# Allegro board ONYXPSU.brd
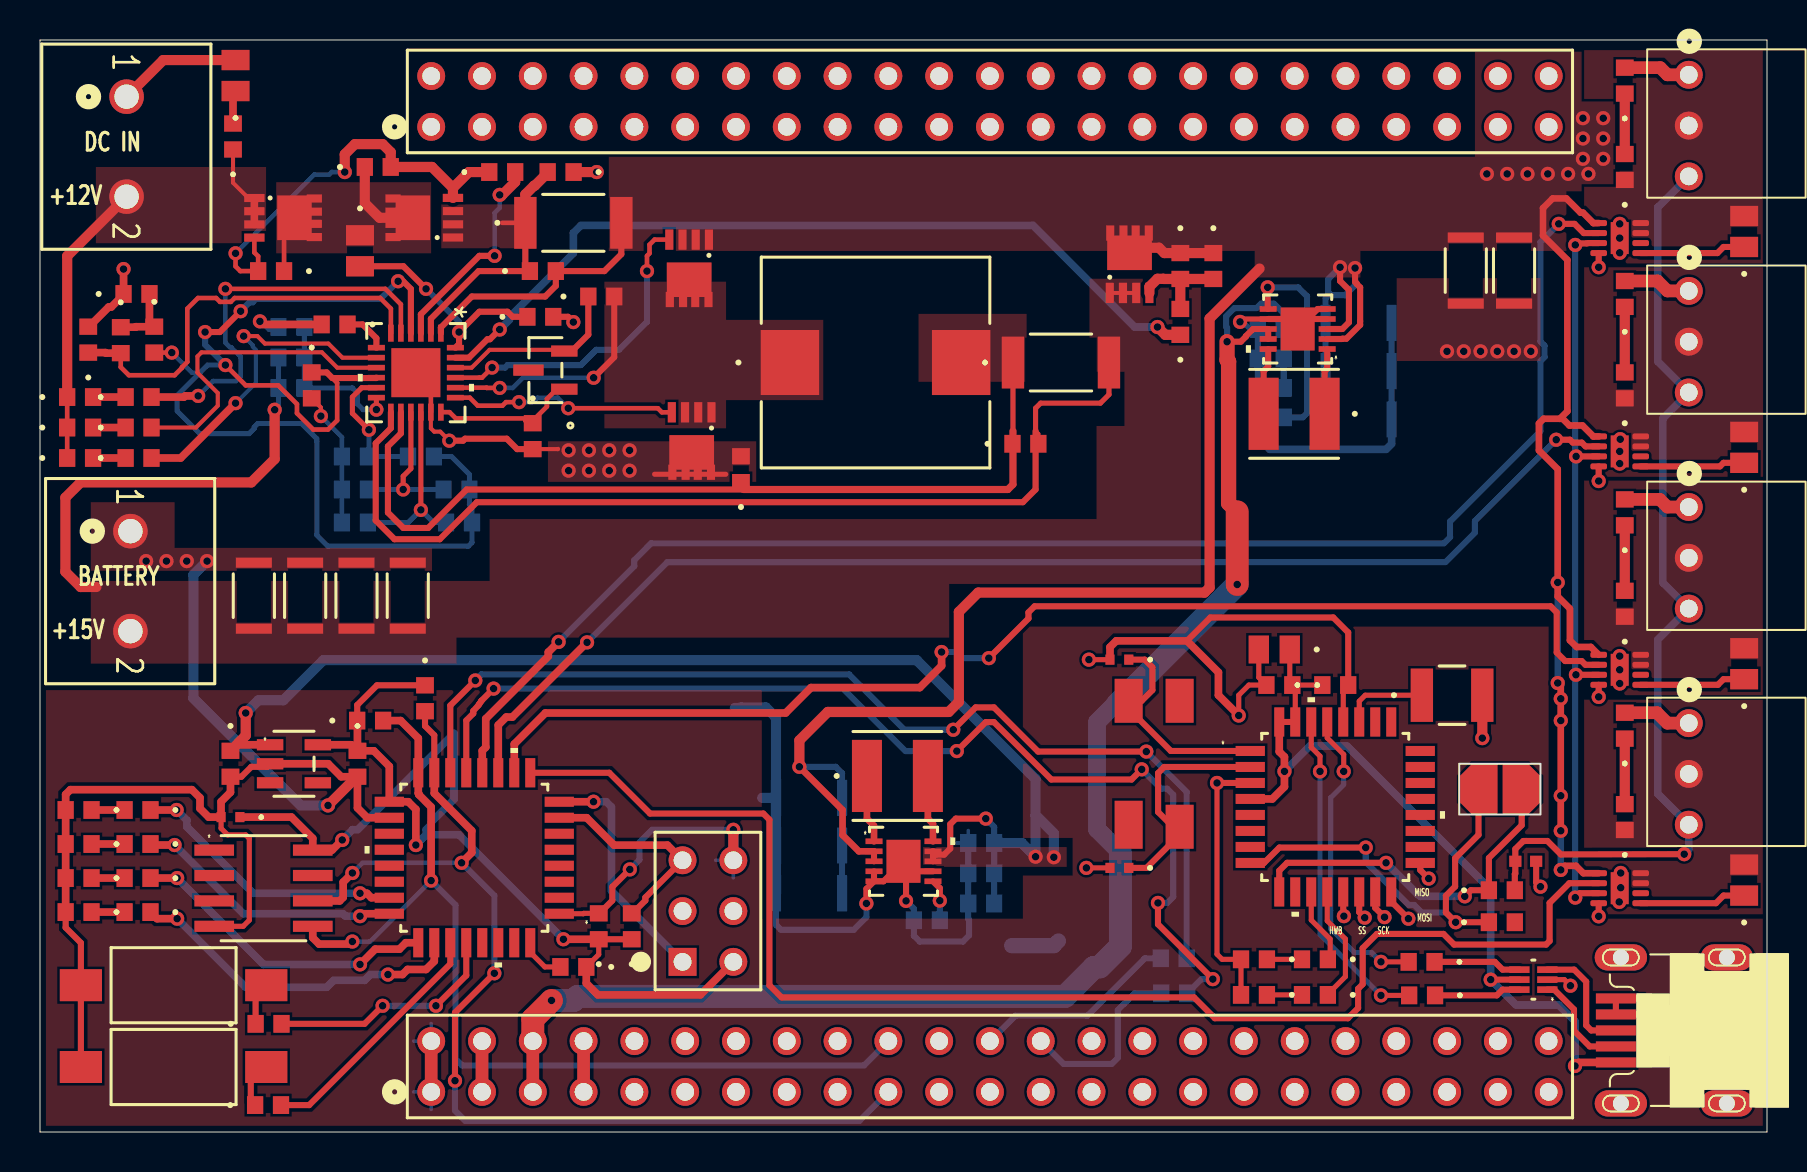
[diagram p0: board, top side]
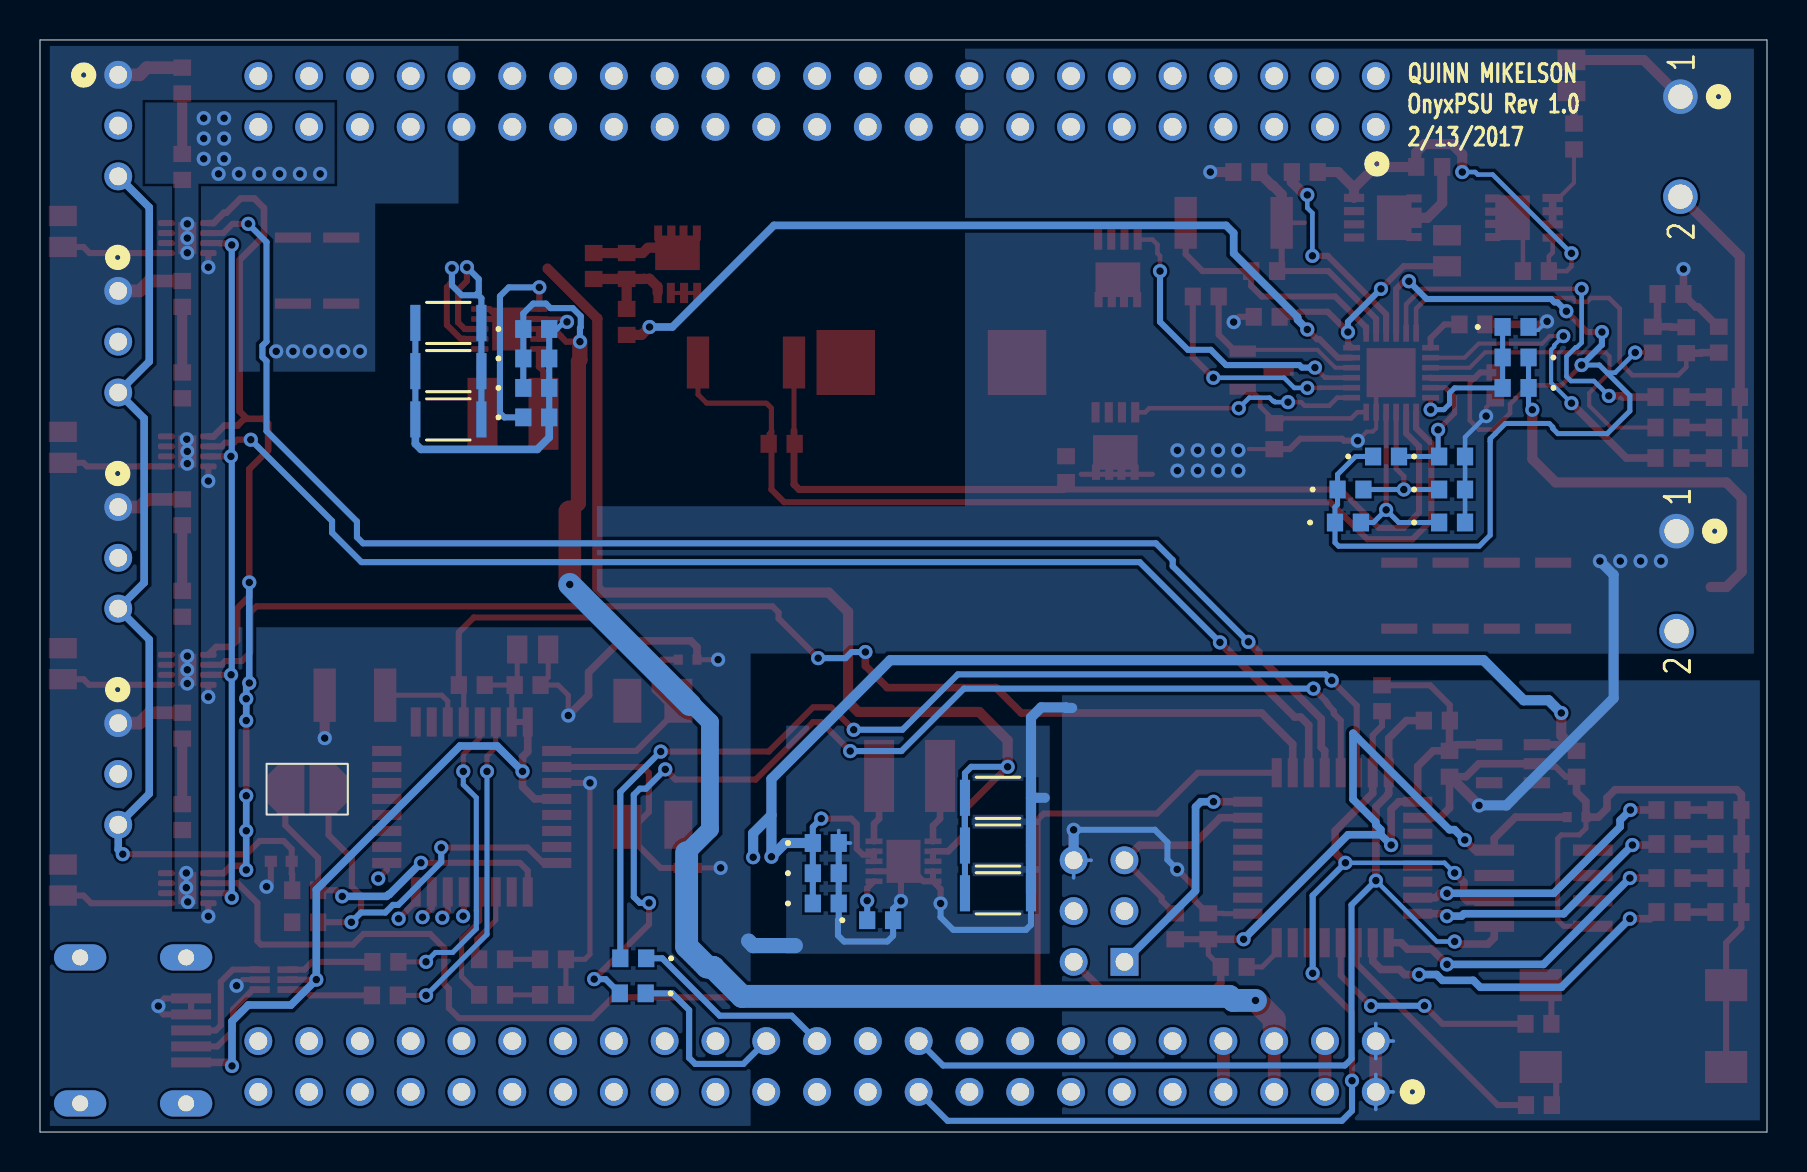
[diagram p1: board, bottom side, seen from below]

Outline 86.36 x 54.61 mm; copper layers: TOP, BOTTOM. Coordinates in mm from the lower left corner of the outline.
Outline path: 0,54.61 0,0 86.36,0 86.36,54.61 0,54.61

## Placement (name value [footprint] x y rotation side)
A0  DXL-AX-SOCKET-3  [DXL_CONNECTOR]  82.45 52.87 270 top
A0_LED  LED_0603  [DK_0603]  79.25 48.26 90 top
A0_RBLEED  698  [DK_0805]  85.22 45.03 90 top
A0_SW  -  [NCP45521IMNTWG-H]  78.93 44.7 270 top
A1  DXL-AX-SOCKET-3  [DXL_CONNECTOR]  82.45 42.06 270 top
A1_LED  LED_0603  [DK_0603]  79.25 37.34 90 top
A1_RBLEED  698  [DK_0805]  85.22 34.24 90 top
A1_SW  -  [NCP45521IMNTWG-H]  78.93 34.04 270 top
A2  DXL-AX-SOCKET-3  [DXL_CONNECTOR]  82.45 31.25 270 top
A2_LED  LED_0603  [DK_0603]  79.25 26.42 90 top
A2_RBLEED  698  [DK_0805]  85.22 23.42 90 top
A2_SW  -  [NCP45521IMNTWG-H]  78.93 23.11 270 top
A3  DXL-AX-SOCKET-3  [DXL_CONNECTOR]  82.45 20.45 270 top
A3_LED  LED_0603  [DK_0603]  79.25 15.75 90 top
A3_RBLEED  698  [DK_0805]  85.22 12.6 90 top
A3_SW  -  [NCP45521IMNTWG-H]  78.93 12.19 270 top
A_R1  470  [DK_0603]  79.25 52.58 90 top
A_R2  470  [DK_0603]  79.25 41.91 90 top
A_R3  470  [DK_0603]  79.25 30.99 90 top
A_R4  470  [DK_0603]  79.25 20.32 90 top
AC_C1  2.2uF  [DK_0805]  9.78 52.83 90 top
AC_R1  2  [DK_0603]  9.65 49.78 90 top
AC_SENSE  .01  [DK_2010]  26.67 45.47 0 top
ACDRV_R1  1K  [DK_0603]  23.11 48.01 0 top
ACSET_R1  100K  [DK_0603]  20.95 30.48 180 bottom
ACSET_R2  154K  [DK_0603]  15.75 30.48 180 bottom
ADAPTER  -  [CONN_282836-2]  4.33 51.78 270 top
AT_C1  4.7uF  [DK_0805]  61.72 24.13 180 top
AT_C2  .1uF  [DK_0603]  64.77 22.35 0 top
AT_C3  .1uF  [DK_0603]  61.98 22.35 180 top
AT_LED1  LED_0603  [DK_0603]  60.71 6.86 180 top
AT_LED2  LED_0603  [DK_0603]  60.71 8.64 180 top
AT_R1  150  [DK_0603]  63.75 6.86 180 top
AT_R2  150  [DK_0603]  63.75 8.64 180 top
AT_UCAP  10uF  [DK_1210]  70.61 21.84 0 top
ATMEGA  ATMEGA32U2-AU  [32A]  64.77 16.26 0 top
AX_ESD  CPDQC5V0-HF  [CPDQC]  74.3 13.54 180 top
AX_R1  150  [DK_0603]  73.1 12.09 0 top
AX_R2  150  [DK_0603]  73.1 10.49 0 top
BATDRV_Q  SI7617DN  [POWERPAK1212-8]  54.48 43.43 90 top
BATDRV_R1  1K  [DK_0603]  57.02 40.51 90 top
BATT_SENSE  .01  [DK_2010]  51.05 38.48 0 top
BATTERY  -  [CONN_282836-2]  4.52 30.05 270 top
BATTERY_CHARGER  BQ24610  [RGE24_2P45X2P45]  18.8 37.97 270 top
BB_P1  Priceless  [2-87215-3]  19.56 2.01 0 top
BB_P2  Priceless  [2-87215-3]  19.56 50.27 0 top
BC_C1  1uF  [DK_0603]  24.64 34.8 270 top
BC_C2  .1uF  [DK_0603]  35.05 33.15 90 top
BC_C3  .1uF  [DK_0603]  49.28 34.42 0 top
BC_C4  .1uF  [DK_0603]  58.67 43.31 270 top
BC_C5  1uF  [DK_0603]  25.02 40.77 0 top
BC_C6  .1uF  [DK_0603]  28.07 41.78 0 top
BC_C7  1uF  [DK_0603]  11.56 43.05 180 top
BC_C8  .1uF  [DK_0603]  26.04 48.01 180 top
BC_C9  .1uF  [DK_0603]  25.15 43.05 0 top
BC_C10  .1uF  [DK_0603]  2.41 39.62 90 top
BC_R1  100K  [DK_0603]  57.02 43.31 270 top
BC_R2  100K  [DK_0603]  16.89 48.26 0 top
BC_VCC_R1  10  [DK_0805]  16 44.07 270 top
BCAP1  10uF  [DK_1206]  10.69 26.82 90 top
BCAP2  10uF  [DK_1206]  15.82 26.82 90 top
BCAP3  10uF  [DK_1206]  13.26 26.82 90 top
BCAP4  10uF  [DK_1206]  18.39 26.82 90 top
BTST_D1  BAT54  [DK_SOT23-3]  25.27 38.1 90 top
BTST_L1  3.3uH  [IND_IHLP-4040DZ]  41.78 38.48 0 top
DC_Q1  SI7617DN  [POWERPAK1212-8]  12.19 45.72 0 top
DC_Q2  SI7617DN  [POWERPAK1212-8]  19.18 45.72 180 top
E_CVCC  .1uF  [DK_0402]  9.53 15.75 180 top
EEPROM  CAT24C256WI-GT3  [D8]  11.18 12.19 0 top
HIDRV_Q  SIS412DN  [POWERPAK1212-8]  32.46 43.15 270 top
ISET1_R1  100K  [DK_0603]  19.05 33.78 180 bottom
ISET1_R2  154K  [DK_0603]  15.75 33.78 180 bottom
ISET2_R1  130K  [DK_0603]  20.83 32.13 180 bottom
ISET2_R2  10K  [DK_0603]  15.75 32.13 180 bottom
LOWDRV_Q  SIS412DN  [POWERPAK1212-8]  32.59 34.52 270 top
PG  LED_0603  [DK_0603]  4.93 33.71 0 top
PG_R  10K  [DK_0603]  2.01 33.71 0 top
PWRPTH_C1  10uF  [DK_1206]  71.3 43.08 270 top
PWRPTH_C2  10uF  [DK_1206]  73.71 43.08 270 top
SJ1  SJ  [SOLDERJUMPER]  -81.81 -31.75 0 top
STAT1  LED_0603  [DK_0603]  4.93 36.75 0 top
STAT1_R  10K  [DK_0603]  2.01 36.75 0 top
STAT2  LED_0603  [DK_0603]  4.93 35.23 0 top
STAT2_R  10K  [DK_0603]  2.01 35.23 0 top
TS_R1  200K  [DK_0603]  4.04 39.6 270 top
TS_R2  9.31K  [DK_0603]  5.71 39.62 270 top
TS_R3  430K  [DK_0603]  4.83 41.91 0 top
TTC_C1  .033uF  [DK_0603]  14.73 40.39 180 top
TVS1  USBLC6-2P6  [SOT-666]  74.68 7.62 180 top
UART_R1  1K  [DK_0603]  56.72 6.93 0 bottom
UART_R2  1K  [DK_0603]  56.69 8.69 0 bottom
UNK5V_C1  10uF  [DK_1206]  38.46 11.94 180 bottom
UNK5V_C2  10uF  [DK_1206]  38.46 14.33 180 bottom
UNK5V_C3  10uF  [DK_1206]  38.46 16.71 180 bottom
UNK5V_C4  22uF  [DK_0603]  47.07 11.43 180 bottom
UNK5V_C5  22uF  [DK_0603]  47.07 12.94 180 bottom
UNK5V_C6  22uF  [DK_0603]  47.07 14.45 180 bottom
UNK5V_C7  .1uF  [DK_0603]  44.35 10.59 180 bottom
UNK5V_C8  10uF  [DK_1206]  65.94 40.46 0 bottom
UNK5V_C9  10uF  [DK_1206]  65.94 38.05 0 bottom
UNK5V_C10  10uF  [DK_1206]  65.94 35.64 0 bottom
UNK5V_C11  22uF  [DK_0603]  61.54 40.16 180 bottom
UNK5V_C12  22uF  [DK_0603]  61.54 38.68 180 bottom
UNK5V_C13  22uF  [DK_0603]  61.54 37.21 180 bottom
UNK5V_C14  .1uF  [DK_0603]  61.54 35.74 180 bottom
UNK5V_L1  1uH  [IND_BOURNS_SRN4018]  42.88 17.81 0 top
UNK5V_L2  1uH  [IND_BOURNS_SRN4018]  62.71 35.92 180 top
UNK5V_REG  TPS63061  [DSC10_1P70X2P15]  43.18 13.54 0 top
UNK5V_REG1  TPS63061  [DSC10_1P70X2P15]  62.89 40.16 180 top
USB1  -  [UX60-USB]  80.45 5.08 180 top
USB_RD+  22  [DK_0603]  69.09 8.51 180 top
USB_RD-  22  [DK_0603]  69.11 6.83 180 top
VFB_C1  22pF  [DK_0603]  12.57 37.21 0 bottom
VFB_R1  732K  [DK_0603]  12.57 38.73 0 bottom
VFB_R2  121K  [DK_0603]  12.57 40.26 180 bottom
VREF_C1  22uF  [DK_0603]  13.59 37.34 270 top
X3_C1  1uF  [DK_0603]  9.53 18.41 270 top
X3_C2  1uF  [DK_0603]  15.88 18.41 270 top
X3_C3  1uF  [DK_0603]  27.94 10.29 90 top
X3_LDO  MIC5504-3.3YM5-TR  [DK_SOT23-5]  12.7 18.41 0 top
X_L1  1.5K @ 100MHz  [DK_0603]  26.67 8.26 180 top
X_RSW1  39  [DK_0603]  11.4 1.35 0 top
X_RSW2  39  [DK_0603]  11.43 5.41 0 top
X_SW1  FSMSM  [SWITCH_FSMSM]  2.04 3.25 0 top
X_SW2  FSMSM  [SWITCH_FSMSM]  2.04 7.34 0 top
XL_LED1  LED_0603  [DK_0603]  1.93 16.1 180 top
XL_LED2  LED_0603  [DK_0603]  1.93 14.4 180 top
XL_LED3  LED_0603  [DK_0603]  1.93 12.7 180 top
XL_LED4  LED_0603  [DK_0603]  1.93 11 180 top
XL_R1  470R  [DK_0603]  4.88 16.1 180 top
XL_R2  470R  [DK_0603]  4.88 14.4 180 top
XL_R3  470R  [DK_0603]  4.88 12.7 180 top
XL_R4  470R  [DK_0603]  4.88 11 180 top
XM_PDI  M20-9980345  [TLW-103-06-F-D]  32.13 8.51 90 top
XM_RPDI  10K  [DK_0603]  29.59 10.29 90 top
XM_RSCL  10K  [DK_0603]  19.25 21.69 270 top
XM_RSDA  10K  [DK_0603]  16.51 20.57 0 top
XMEGA  ATXMEGA32E5-AU  [32A]  21.72 13.72 180 top
Y1  16.00MHz  [DFN-4_CRYSTAL]  56.12 18.01 270 top
Y_C1  18pF  [DK_0402]  53.98 23.62 180 top
Y_C2  18pF  [DK_0402]  53.98 13.21 180 top

## Library data of the parts
A0-A3 = DXL-AX-SOCKET-3
A0_LED A1_LED A2_LED A3_LED AT_LED1 AT_LED2 PG STAT1 STAT2 XL_LED1-XL_LED4 = LED_0603
A0_RBLEED A1_RBLEED A2_RBLEED A3_RBLEED A_R1-A_R4 AC_R1 AC_SENSE ACDRV_R1 ACSET_R1 ACSET_R2 AT_R1 AT_R2 AX_R1 AX_R2 BATDRV_R1 BATT_SENSE BC_R1 BC_R2 BC_VCC_R1 ISET1_R1 ISET1_R2 ISET2_R1 ISET2_R2 PG_R STAT1_R STAT2_R TS_R1-TS_R3 UART_R1 UART_R2 USB_RD+ USB_RD- VFB_R1 VFB_R2 X_RSW1 X_RSW2 XL_R1-XL_R4 XM_RPDI XM_RSCL XM_RSDA = R
A0_SW A1_SW A2_SW A3_SW = NCP45521IMNTWG-H_5
AC_C1 AT_C1-AT_C3 AT_UCAP BC_C1-BC_C10 BCAP1-BCAP4 E_CVCC PWRPTH_C1 PWRPTH_C2 TTC_C1 UNK5V_C1-UNK5V_C14 VFB_C1 VREF_C1 X3_C1-X3_C3 Y_C1 Y_C2 = C_NP
ADAPTER BATTERY = SCREWTERM
ATMEGA = ATMEGA32U2_0
AX_ESD = D_ZENER
BATDRV_Q DC_Q1 DC_Q2 = SI7617DN
BATTERY_CHARGER = BQ24610
BB_P1 BB_P2 = BB-HEADER-46
BTST_D1 = BAT54-7-F
BTST_L1 UNK5V_L1 UNK5V_L2 X_L1 = L
EEPROM = CAT24C256
HIDRV_Q LOWDRV_Q = SIS412DN
SJ1 = SOLDER_JUMPER
TVS1 = USBLC6-2P6
UNK5V_REG UNK5V_REG1 = TPS63061
USB1 = UX60-USB
X3_LDO = MIC5504
X_SW1 X_SW2 = Q_SWITCH_MOM
XM_PDI = PDI_HEADER
XMEGA = ATXMEGA32E5-AN
Y1 = ABMM-16.000MHZ

## Footprints (pads in the part's own frame, mm; a bottom-side part is the same pattern mirrored in y, then rotated)
2-87215-3
  round 1.397 hole 0.889: 1(0,0) 2(0,2.54) 3(2.54,0) 4(2.54,2.54) 5(5.08,0) 6(5.08,2.54) 7(7.62,0) 8(7.62,2.54) 9(10.16,0) 10(10.16,2.54) 11(12.7,0) 12(12.7,2.54) 13(15.24,0) 14(15.24,2.54) 15(17.78,0) 16(17.78,2.54) 17(20.32,0) 18(20.32,2.54) 19(22.86,0) 20(22.86,2.54) 21(25.4,0) 22(25.4,2.54) 23(27.94,0) 24(27.94,2.54) 25(30.48,0) 26(30.48,2.54) 27(33.02,0) 28(33.02,2.54) 29(35.56,0) 30(35.56,2.54) 31(38.1,0) 32(38.1,2.54) 33(40.64,0) 34(40.64,2.54) 35(43.18,0) 36(43.18,2.54) 37(45.72,0) 38(45.72,2.54) 39(48.26,0) 40(48.26,2.54) 41(50.8,0) 42(50.8,2.54) 43(53.34,0) 44(53.34,2.54) 45(55.88,0) 46(55.88,2.54)
32A
  rect 1.461x0.501 smd: 1(-4.25,2.8) 2(-4.25,2) 3(-4.25,1.2) 4(-4.25,0.4) 5(-4.25,-0.4) 6(-4.25,-1.2) 7(-4.25,-2) 8(-4.25,-2.8) 17(4.25,-2.8) 18(4.25,-2) 19(4.25,-1.2) 20(4.25,-0.4) 21(4.25,0.4) 22(4.25,1.2) 23(4.25,2) 24(4.25,2.8)
  rect 0.501x1.461 smd: 9(-2.8,-4.25) 10(-2,-4.25) 11(-1.2,-4.25) 12(-0.4,-4.25) 13(0.4,-4.25) 14(1.2,-4.25) 15(2,-4.25) 16(2.8,-4.25) 25(2.8,4.25) 26(2,4.25) 27(1.2,4.25) 28(0.4,4.25) 29(-0.4,4.25) 30(-1.2,4.25) 31(-2,4.25) 32(-2.8,4.25)
CONN_282836-2
  round 1.727 hole 1.219: 1(0,0) 2(5,0)
CPDQC
  rect 0.61x0.559 smd: 1(-0.521,0) 2(0.521,0)
D8
  rect 1.981x0.559 smd: 1(-2.464,1.905) 2(-2.464,0.635) 3(-2.464,-0.635) 4(-2.464,-1.905) 5(2.464,-1.905) 6(2.464,-0.635) 7(2.464,0.635) 8(2.464,1.905)
DFN-4_CRYSTAL
  rect 2.2x1.4 smd: 1(-3.55,-1.68) 2(-3.55,0.87) 3(2.75,0.87)
  rect 2.4x1.4 smd: 4(2.65,-1.68)
DK_0402
  rect 0.457x0.508 smd: 1(-0.47,0) 2(0.47,0)
DK_0603
  rect 0.813x0.889 smd: 1(-0.648,0) 2(0.648,0)
DK_0805
  rect 1.016x1.397 smd: 1(-0.775,0) 2(0.775,0)
DK_1206
  rect 0.508x1.803 smd: 1(-1.651,0) 2(1.651,0)
DK_1210
  rect 1.118x2.667 smd: 1(-1.511,0) 2(1.511,0)
DK_2010
  rect 1.118x2.591 smd: 1(-2.4,0) 2(2.4,0)
DK_SOT23-3
  rect 0.559x1.321 smd: 1(-0.953,-0.945) 2(0.953,-0.945)
  rect 0.559x1.517 smd: 3(0,0.847)
DK_SOT23-5
  rect 1.321x0.559 smd: 1(-1.194,0.95) 2(-1.194,0) 3(-1.194,-0.95) 4(1.194,-0.95) 5(1.194,0.95)
DSC10_1P70X2P15
  rect 0.85x0.28 smd: 1(-1.475,1) 2(-1.475,0.5) 3(-1.475,0) 4(-1.475,-0.5) 5(-1.475,-1) 6(1.475,-1) 7(1.475,-0.5) 8(1.475,0) 9(1.475,0.5) 10(1.475,1)
  rect 1.7x2.15 smd: 11(0,0)
DXL_CONNECTOR
  round 1.397 hole 0.889: 1(0,0) 2(2.54,0) 3(5.08,0)
IND_BOURNS_SRN4018
  rect 1.499x3.607 smd: 1(-1.524,0) 2(1.524,0)
IND_IHLP-4040DZ
  rect 2.921x3.251 smd: 1(-4.28,0) 2(4.28,0)
NCP45521IMNTWG-H
  custom 0.3x0.83 smd: 1(-0.75,-0.985) 2(-0.25,-0.985) 3(0.25,-0.985) 4(0.75,-0.985) 5(0.75,1.115) 6(0.25,1.115) 7(-0.25,1.115) 8(-0.75,1.115)
  rect 1.6x0.9 smd: TH(0,0.065)
POWERPAK1212-8
  rect 1.016x0.406 smd: 1(-1.473,0.988) 2(-1.473,0.328) 3(-1.473,-0.333) 4(-1.473,-0.993)
  custom 2.235x2.337 smd: 5(0.787,0)
RGE24_2P45X2P45
  rect 0.85x0.28 smd: 1(-1.975,1.25) 2(-1.975,0.75) 3(-1.975,0.25) 4(-1.975,-0.25) 5(-1.975,-0.75) 6(-1.975,-1.25) 13(1.975,-1.25) 14(1.975,-0.75) 15(1.975,-0.25) 16(1.975,0.25) 17(1.975,0.75) 18(1.975,1.25)
  rect 0.28x0.85 smd: 7(-1.25,-1.975) 8(-0.75,-1.975) 9(-0.25,-1.975) 10(0.25,-1.975) 11(0.75,-1.975) 12(1.25,-1.975) 19(1.25,1.975) 20(0.75,1.975) 21(0.25,1.975) 22(-0.25,1.975) 23(-0.75,1.975) 24(-1.25,1.975)
  rect 2.45x2.45 smd: 25(0,0)
SOLDERJUMPER
  custom 1.905x2.54 smd: 1(153.746,48.895) 2(155.905,48.895)
SOT-666
  rect 1.016x0.33 smd: 1(-0.699,0.5) 2(-0.699,0) 3(-0.699,-0.5) 4(0.699,-0.5) 5(0.699,0) 6(0.699,0.5)
SWITCH_FSMSM
  rect 2.108x1.6 smd: 1(0,0) 2(9.271,0)
TLW-103-06-F-D
  rect 1.397x1.397 hole 0.889: 1(0,0)
  round 1.397 hole 0.889: 2(0,-2.54) 3(2.54,0) 4(2.54,-2.54) 5(5.08,0) 6(5.08,-2.54)
UX60-USB
  oval 2.616x1.308 hole 0.8: (-3.9,3.65) (-3.9,-3.65) (1.4,3.65) (1.4,-3.65)
  rect 2x0.5 smd: 1(1.65,1.6) 2(1.65,0.8) 3(1.65,0) 4(1.65,-0.8) 5(1.65,-1.6)

## Nets
5V: A0_SW.3(VCC) A1_SW.3(VCC) A2_SW.3(VCC) A3_SW.3(VCC)
5V_PSU: UNK5V_C4.1 UNK5V_C5.1 UNK5V_C6.1 UNK5V_REG.8 UNK5V_REG.9 X3_C1.1 X3_LDO.1(IN)
AVCC: X_L1.2 XMEGA.32(AVCC)
VDD_3V3: BB_P1.3 BB_P1.4
VDD_5V: BB_P1.5 BB_P1.6 UNK5V_C11.1 UNK5V_C12.1 UNK5V_C13.1 UNK5V_REG1.8 UNK5V_REG1.9
2: Y1.2
4: Y1.4
A0_CONTROL: A0_SW.2(EN) XMEGA.12(PC4)
A1_CONTROL: A1_SW.2(EN) XMEGA.11(PC5)
A2_CONTROL: A2_SW.2(EN) XMEGA.10(PC6)
A3_CONTROL: A3_SW.2(EN) XMEGA.9(PC7)
A_CH0: A0.2(+) A0_LED.1(ANODE) A0_RBLEED.2 A0_SW.7(VOUTB) A0_SW.8(VOUTA)
A_CH1: A1.2(+) A1_LED.1(ANODE) A1_RBLEED.2 A1_SW.7(VOUTB) A1_SW.8(VOUTA)
A_CH2: A2.2(+) A2_LED.1(ANODE) A2_RBLEED.2 A2_SW.7(VOUTB) A2_SW.8(VOUTA)
A_CH3: A3.2(+) A3_LED.1(ANODE) A3_RBLEED.2 A3_SW.7(VOUTB) A3_SW.8(VOUTA)
ACSET: ACSET_R1.2 ACSET_R2.1 BATTERY_CHARGER.16(ACSET)
AX_BUS: A0.3(DATA) A1.3(DATA) A2.3(DATA) A3.3(DATA) AX_ESD.2 AX_R1.2
BATTERY: BATDRV_Q.1(S1) BATDRV_Q.2(S2) BATDRV_Q.3(S3) BATT_SENSE.2 BATTERY.2 BATTERY_CHARGER.13(SRN) BC_C3.2 BCAP1.1 BCAP2.1 BCAP3.1 BCAP4.1 VFB_C1.1 VFB_R1.1
COMMON: A0.1(-) A0_SW.4(GND) A1.1(-) A1_SW.4(GND) A2.1(-) A2_SW.4(GND) A3.1(-) A3_SW.4(GND) A_R1.2 A_R2.2 A_R3.2 A_R4.2 AC_C1.2 ACSET_R2.2 ADAPTER.1 AT_C1.2 AT_C2.2 AT_C3.2 AT_LED1.2(CATHODE) AT_LED2.2(CATHODE) AT_UCAP.2 ATMEGA.3(GND) ATMEGA.28(UGND) AX_ESD.1 BATTERY.1 BATTERY_CHARGER.17(GND) BATTERY_CHARGER.25(PAD) BB_P1.1 BB_P1.2 BC_C1.2 BC_C2.2 BC_C5.2 BC_C8.1 BC_C10.2 BCAP1.2 BCAP2.2 BCAP3.2 BCAP4.2 E_CVCC.2 EEPROM.4(VSS) ISET1_R2.2 ISET2_R2.2 LOWDRV_Q.5(D) PWRPTH_C1.2 PWRPTH_C2.2 TS_R3.1 TTC_C1.2 TVS1.2(GND) UNK5V_C1.2 UNK5V_C2.2 UNK5V_C3.2 UNK5V_C4.2 UNK5V_C5.2 UNK5V_C6.2 UNK5V_C7.2 UNK5V_REG.4 UNK5V_REG.5 UNK5V_REG.7 UNK5V_REG.11 USB1.4(ID) USB1.5(GND) VFB_R2.2 VREF_C1.2 X3_C1.2 X3_C2.2 X3_C3.2 X3_LDO.2(GND) X_SW1.1 X_SW2.1 XL_LED1.2(CATHODE) XL_LED2.2(CATHODE) XL_LED3.2(CATHODE) XL_LED4.2(CATHODE) XM_PDI.6(GND) XMEGA.1(GNDA) XMEGA.18(GNDB) Y_C1.2 Y_C2.2
DC_IN+: AC_R1.1 ADAPTER.2 DC_Q1.1(S1) DC_Q1.2(S2) DC_Q1.3(S3) PG_R.1 STAT1_R.1 STAT2_R.1
HP_B: BC_C7.1 BC_R2.1 BC_VCC_R1.1 DC_Q1.5(D) DC_Q2.5(D)
HP_C: AC_SENSE.1 BATTERY_CHARGER.2(ACP) BC_C8.2 BC_C9.1 DC_Q2.1(S1) DC_Q2.2(S2) DC_Q2.3(S3)
HWB: ATMEGA.13(PD7)
I2C2_SCL: BB_P1.19 EEPROM.6(SCL) XM_RSCL.2 XMEGA.15(PC1)
I2C2_SDA: BB_P1.20 EEPROM.5(SDA) XM_RSDA.2 XMEGA.16(PC0)
ISET1: BATTERY_CHARGER.11(ISET1) ISET1_R1.2 ISET1_R2.1
ISET2: BATTERY_CHARGER.15(ISET2) ISET2_R1.2 ISET2_R2.1
LED1: AT_R1.1 ATMEGA.12((RTS) PD6)
LED2: AT_R2.1 ATMEGA.11((XCK) PD5)
MISO: ATMEGA.17(PB3 (PDO / MISO / PCINT3))
MOSI: ATMEGA.16((PDI / MOSI / PCINT2) PB2)
PDI: XM_PDI.1(DATA) XMEGA.8(PDI / RESET)
PDI_CLK: XM_PDI.5(CLK) XM_RPDI.2 XMEGA.7(PDI)
RESET: ATMEGA.24(RESET)
RX: AX_R2.2
SCK: ATMEGA.15((SCLK / PCINT1) PB1)
SRP: BATT_SENSE.1 BATTERY_CHARGER.14(SRP) BC_C2.1 BC_C3.1 BTST_L1.2
SS: ATMEGA.14((SS / PCINT0) PB0)
SYS_5V: BB_P1.7 BB_P1.8
SYS_GND: UNK5V_C8.2 UNK5V_C9.2 UNK5V_C10.2 UNK5V_C11.2 UNK5V_C12.2 UNK5V_C13.2 UNK5V_C14.2 UNK5V_REG1.4 UNK5V_REG1.5 UNK5V_REG1.7 UNK5V_REG1.11
SYSTEM+: A0_SW.1(VIN) A0_SW.TH(PAD) A1_SW.1(VIN) A1_SW.TH(PAD) A2_SW.1(VIN) A2_SW.TH(PAD) A3_SW.1(VIN) A3_SW.TH(PAD) AC_SENSE.2 BATDRV_Q.5(D) BATTERY_CHARGER.1(ACN) BC_C4.1 BC_C9.2 BC_R1.1 HIDRV_Q.1(S1) HIDRV_Q.2(S2) HIDRV_Q.3(S3) PWRPTH_C1.1 PWRPTH_C2.1 UNK5V_C1.1 UNK5V_C2.1 UNK5V_C3.1 UNK5V_C8.1 UNK5V_C9.1 UNK5V_C10.1 UNK5V_REG.2 UNK5V_REG.3 UNK5V_REG1.2 UNK5V_REG1.3
THERM: TS_R1.1 TS_R2.1 TS_R3.2
TS: BATTERY_CHARGER.6(TS) BC_C10.1 TS_R1.2
UART_RXD: XMEGA.22(PD6)
UART_TXD: XMEGA.21(PD7)
USB5V: AT_C1.1 AT_C2.1 AT_C3.1 ATMEGA.4(VCC) ATMEGA.31(UVCC) ATMEGA.32(AVCC) TVS1.5(VBUS) USB1.1(VCC)
VFB: BATTERY_CHARGER.12(VFB) VFB_C1.2 VFB_R1.2 VFB_R2.1
VREF: ACSET_R1.1 BATTERY_CHARGER.4(CE) BATTERY_CHARGER.10(VREF) ISET1_R1.1 ISET2_R1.1 TS_R2.2 VREF_C1.1
XAVR_RX: UART_R2.2 XMEGA.14(PC2)
XAVR_TX: UART_R1.2 XMEGA.13(PC3)
XL_LED1: XL_R1.1 XMEGA.23(PD5)
XL_LED2: XL_R2.1 XMEGA.24(PD4)
XL_LED3: XL_R3.1 XMEGA.25(PD3)
XL_LED4: XL_R4.1 XMEGA.26(PD2)
XMEGA_3V3: E_CVCC.1 EEPROM.8(VCC) X3_C2.1 X3_C3.1 X3_LDO.5(OUT) X_L1.1 XM_PDI.2(VCC) XM_RPDI.1 XM_RSCL.1 XM_RSDA.1 XMEGA.17(VCC)
XSW1: X_RSW1.2 XMEGA.27(PD1)
XSW2: X_RSW2.2 XMEGA.28(PD0)
XTAL1: ATMEGA.1(XTAL1) Y1.1 Y_C1.1
XTAL2: ATMEGA.2(XTAL2) Y1.3 Y_C2.1
N00755: UNK5V_C7.1 UNK5V_REG.6
N01124: UNK5V_L1.1 UNK5V_REG.1
N01136: UNK5V_L1.2 UNK5V_REG.10
N06480: BATTERY_CHARGER.7(TTC) TTC_C1.1
N10941: BATTERY_CHARGER.22(BTST) BC_C6.1 BTST_D1.2
N11437: BATTERY_CHARGER.18(REGN) BC_C1.1 BTST_D1.1
N12143: BATTERY_CHARGER.20(PH) BC_C6.2 BTST_L1.1 HIDRV_Q.5(D) LOWDRV_Q.1(S1) LOWDRV_Q.2(S2) LOWDRV_Q.3(S3)
N12276: BATTERY_CHARGER.19(LODRV) LOWDRV_Q.4(G)
N13368: BATTERY_CHARGER.21(HIDRV) HIDRV_Q.4(G)
N13432: BATTERY_CHARGER.24(VCC) BC_C5.1 BC_VCC_R1.2
N14571: BATDRV_Q.4(G) BATDRV_R1.2 BC_C4.2 BC_R1.2
N17959: ACDRV_R1.1 BC_C7.2 BC_R2.2 DC_Q1.4(G) DC_Q2.4(G)
N25363: AT_UCAP.1 ATMEGA.27(UCAP)
N28611: ATMEGA.9((TXD1 / INT3) PD3) AX_R1.1 SJ1.2(B)
N28615: ATMEGA.8((RXD1 / AIN1 / INT2) PD2) AX_R2.1 SJ1.1(A)
N52573: XL_LED1.1(ANODE) XL_R1.2
N52694: XL_LED2.1(ANODE) XL_R2.2
N78533: BATDRV_R1.1 BATTERY_CHARGER.23(BATDRV)
N88999: XL_LED3.1(ANODE) XL_R3.2
N237956: X_RSW1.1 X_SW1.2
N237958: X_RSW2.1 X_SW2.2
N239177: XL_LED4.1(ANODE) XL_R4.2
N264783: UNK5V_C14.1 UNK5V_REG1.6
N264867: UNK5V_L2.1 UNK5V_REG1.1
N264879: UNK5V_L2.2 UNK5V_REG1.10
N296592: ATMEGA.30(D-) USB_RD-.2
N308927: TVS1.3(BIN) USB1.3(D+)
N308936: TVS1.1(AIN) USB1.2(D-)
N309107: ATMEGA.29(D+) USB_RD+.2
N311917: TVS1.6(AOUT) USB_RD-.1
N311931: TVS1.4(BOUT) USB_RD+.1
N338027: BATTERY_CHARGER.5(STAT1) STAT1.2(CATHODE)
N338054: BATTERY_CHARGER.9(STAT2) STAT2.2(CATHODE)
N338081: BATTERY_CHARGER.8(PG) PG.2(CATHODE)
N339049: ACDRV_R1.2 BATTERY_CHARGER.3(ACDRV)
N361426: A1_RBLEED.1 A1_SW.5(BLEED)
N369889: BB_P1.26 UART_R1.1
N369898: BB_P1.24 UART_R2.1
N1531774: A0_RBLEED.1 A0_SW.5(BLEED)
N1533194: A2_RBLEED.1 A2_SW.5(BLEED)
N1533894: A3_RBLEED.1 A3_SW.5(BLEED)
N2875681: A0_LED.2(CATHODE) A_R1.1
N2875801: A1_LED.2(CATHODE) A_R2.1
N2875921: A2_LED.2(CATHODE) A_R3.1
N2876041: A3_LED.2(CATHODE) A_R4.1
N2971130: AT_LED2.1(ANODE) AT_R2.2
N2971680: AT_LED1.1(ANODE) AT_R1.2
N3380210: STAT1.1(ANODE) STAT1_R.2
N3380480: STAT2.1(ANODE) STAT2_R.2
N3380750: PG.1(ANODE) PG_R.2
N3477030: AC_C1.1 AC_R1.2

Pads without a net: A0_SW 6; A1_SW 6; A2_SW 6; A3_SW 6; ATMEGA 5 6 7 10 18 19 20 21 22 23 25 26; BB_P1 9 10 11 12 13 14 15 16 17 18 21 22 23 25 27 28 29 30 31 32 33 34 35 36 37 38 39 40 41 42 43 44 45 46; BB_P2 1 2 3 4 5 6 7 8 9 10 11 12 13 14 15 16 17 18 19 20 21 22 23 24 25 26 27 28 29 30 31 32 33 34 35 36 37 38 39 40 41 42 43 44 45 46; BTST_D1 3; EEPROM 1 2 3 7; X3_LDO 3 4; XM_PDI 3 4; XMEGA 2 3 4 5 6 19 20 29 30 31

## Via types
v1: diameter 0.711, hole 0.381, TOP to BOTTOM, 168 vias

## Routing (per net, layer and track width the routed paths; a pad name or vN(x,y) marks a point on that pad's centre or on a via; arc(x,y) is an arc through that point)
5V: length 37.5
  TOP w0.305: v1(76.77,11.72) 76.99,11.94 A3_SW.3 ; A2_SW.3 v1(76.81,22.86) ; v1(76.77,44.36) 76.85,44.44 77.34,44.44 77.43,44.45 A0_SW.3 ; A1_SW.3 v1(76.81,33.79)
  BOTTOM w0.305: 76.77,22.78 76.77,33.81 ; 76.77,22.78 v1(76.77,11.72) ; 76.77,22.78 76.81,22.82 v1(76.81,22.86) ; 76.77,33.81 76.79,33.79 v1(76.81,33.79) ; 76.77,33.81 v1(76.77,44.36)
5V_PSU: length 64.8
  TOP w0.305: UNK5V_REG.8 UNK5V_REG.9 44.82,13.87 45.21,13.87 45.52,14.17 45.52,15.39 45.8,15.67 v1(47.29,15.67)
  TOP w0.381: X3_LDO.1 9.83,19.36 X3_C1.1
  TOP w0.508: v1(10.29,20.95) 10.29,19.82 9.83,19.36
  BOTTOM w0.305: v1(47.29,15.67) 47.71,15.25 UNK5V_C6.1 UNK5V_C5.1 UNK5V_C4.1
  BOTTOM w0.508: UNK5V_C6.1 49.1,14.45 v1(49.78,13.77) 49.78,15.85 ; 49.78,15.85 50.7,14.94 v1(50.7,13.74) ; 49.78,15.85 49.78,17.65 43.84,23.6 14.17,23.6 12.17,21.59 10.92,21.59 v1(10.29,20.95)
AVCC: length 2.3
  TOP w0.254: X_L1.2 25.25,8.26 24.52,8.99 XMEGA.32
VDD_3V3: length 2.5
  TOP w0.635: BB_P1.4 BB_P1.3
VDD_5V: length 79.6
  TOP w0.305: v1(59.36,39.52) 60.05,39.52 60.3,39.78 60.3,39.8 60.66,40.16 UNK5V_REG1.8 UNK5V_REG1.9
  TOP w0.635: BB_P1.6 BB_P1.5
  TOP w0.762: v1(59.36,39.52) 59.36,38.61 59.44,38.53 59.44,31.45 59.87,31.01
  TOP w1.143: BB_P1.6 24.64,5.64 v1(25.58,6.58) ; v1(59.87,27.38) 59.87,31.01
  BOTTOM w0.305: v1(59.36,39.52) 59.36,40.21 59.32,40.25 59.32,40.8 59.72,41.2 60.84,41.2 61.06,41.43 61.7,41.43 62.19,40.93 UNK5V_C11.1 UNK5V_C12.1 UNK5V_C13.1
  BOTTOM w0.889: 53.86,21.37 53.73,21.37 52.86,20.5 52.86,15.14 54.03,13.97
  BOTTOM w1.143: 53.86,21.37 v1(59.87,27.38) ; 54.03,13.97 54.03,9.28 53,8.25 52.74,8.23 52.71,8.23 52.69,8.22 52.69,8.22 51.26,6.78 26.89,6.78 26.69,6.58 v1(25.58,6.58)
A0_CONTROL: length 75.3
  TOP w0.305: A0_SW.2 77.2,44.95 76.73,45.42 v1(75.95,45.42)
  TOP w0.381: v1(25.93,24.51) 25.42,24 25.42,23.79 22.29,20.66 22.29,19.24 22.12,19.07 XMEGA.12
  BOTTOM w0.305: v1(25.93,24.51) 29.72,28.3 29.72,28.6 30.56,29.44 70.21,29.44 70.51,29.74 70.51,30.53 75.03,35.05 75.03,38.55 75.24,38.75 75.24,39.33 75.03,39.53 75.03,44.5 v1(75.95,45.42)
A1_CONTROL: length 63.8
  TOP w0.305: A1_SW.2 77.29,34.29 77.1,34.47 76.65,34.47 76.51,34.62 v1(75.82,34.62)
  TOP w0.381: v1(27.36,24.49) 23.62,20.75 23.32,20.75 22.92,20.35 XMEGA.11
  BOTTOM w0.305: v1(27.36,24.49) 31.37,28.5 70.28,28.5 71.75,29.97 71.75,30.56 v1(75.82,34.62)
A2_CONTROL: length 61.7
  TOP w0.305: A2_SW.2 77.28,23.36 77.09,23.55 76.27,23.55 75.84,23.98 75.84,25.98 75.54,26.29 49.73,26.29 49.43,25.98 49.43,25.68 v1(47.45,23.7)
  TOP w0.381: v1(45.09,24) 45.09,23.31 44,22.23 38.56,22.23 37.29,20.95 25.27,20.95 23.72,19.4 XMEGA.10
  BOTTOM w0.305: v1(47.45,23.7) 46.08,23.7 45.77,24 v1(45.09,24)
A3_CONTROL: length 69.3
  TOP w0.305: A3_SW.2 76.48,12.44 75.49,11.46 75.49,9.55 75.31,9.37 70.71,9.37 70.18,9.91 66.85,9.91 66.14,9.19 66.14,7.39 65.91,7.16 65.91,6.2 65.41,5.69 58.75,5.69 57.71,6.73 37.08,6.73 36.47,7.34 36.47,15.62 36.17,15.93 30.51,15.93 28.47,17.97 XMEGA.9
ACSET: length 9.3
  TOP w0.254: BATTERY_CHARGER.16 v1(19.05,31.11)
  BOTTOM w0.254: ACSET_R2.1 18.41,30.48 v1(19.05,31.11) 19.68,30.48 ACSET_R1.2
AX_BUS: length 48.6
  TOP w0.305: v1(82.22,13.89) 76.05,13.88 75.38,14.55 74.32,14.55 74.18,14.55 73.77,14.15 AX_ESD.2 73.77,12.93 73.75,12.9 AX_R1.2
  BOTTOM w0.381: A0.3 80.9,46.24 80.9,38.53 A1.3 81.15,35.69 81.15,27.47 A2.3 80.9,24.63 80.9,16.92 A3.3 82.45,14.12 v1(82.22,13.89)
BATTERY: length 73.8
  TOP w0.203: 49.78,35.05 49.92,34.91 BC_C3.2 ; BATDRV_Q.3 BATDRV_Q.2 BATDRV_Q.1
  TOP w0.254: 49.78,35.05 49.78,36.2 50.04,36.45 53.03,36.45 53.45,36.88 BATT_SENSE.2
  TOP w0.305: 49.78,35.05 49.78,32.13 49.15,31.5 21.84,31.5 19.99,29.64 17.73,29.64 16.79,30.58 16.79,34.44 17.55,35.2 BATTERY_CHARGER.13
  TOP w0.508: v1(11.73,36.12) 11.73,33.66 10.57,32.49 2.03,32.49 1.27,31.72 1.27,28.02 2.03,27.25 2.82,27.25
  BOTTOM w0.254: VFB_R1.1 VFB_C1.1 11.93,36.31 v1(11.73,36.12)
COMMON: length 230.2
  TOP w0.203: BC_C1.2 25.9,34.15 25.91,34.16 ; v1(20.47,34.57) 20.02,35.02 19.71,35.02 19.55,35.19 BATTERY_CHARGER.17 ; VREF_C1.2 14.05,36.23 v1(14.05,35.8)
  TOP w0.229: BATTERY_CHARGER.17 19.55,37.22 BATTERY_CHARGER.25
  TOP w0.254: ATMEGA.28 65.17,22.1 AT_C2.2 ; TVS1.2 76.23,7.62 v1(76.53,7.32) ; Y_C1.2 v1(52.45,23.62) ; EEPROM.4 10.16,10.29 10.47,10.59 10.47,14.68 10.29,14.86 9.38,14.86 9.06,15.19 E_CVCC.2 ; AT_LED1.2 AT_LED2.2 59.11,8.64 58.86,8.89 v1(58.86,17.46) ; XMEGA.1 27.17,10.92 27.19,10.93 X3_C3.2 ; AT_C1.2 60.95,22.73 AT_C3.2 60.45,22.35 59.94,21.84 v1(59.94,20.83) ; Y_C2.2 v1(52.32,13.21) ; 34.29,32.89 30.73,32.89
  TOP w0.305: A3_SW.4 v1(77.94,10.79) ; A0_SW.4 v1(77.94,43.25) ; v1(20.47,34.57) 21.16,34.57 21.25,34.67 23.34,34.67 23.86,34.15 BC_C1.2 ; 57.35,24.56 58.52,25.73 64.67,25.73 65.42,24.98 AT_C2.2 ; UNK5V_REG.7 43.68,13.04 43.31,13.41 ; UNK5V_REG.5 41.33,12.16 v1(41.33,11.43) ; UNK5V_REG.5 42.18,12.54 UNK5V_REG.11 43.31,13.41 ; UNK5V_REG.5 UNK5V_REG.4 ; X_SW1.1 X_SW2.1 2.04,9.46 1.28,10.22 XL_LED4.2 ; ATMEGA.3 v1(58.86,17.46) ; v1(29.49,13.13) 28.62,12.26 28.62,11.58 27.98,10.93 X3_C3.2 ; 43.31,13.41 v1(43.31,11.56) ; A2_SW.4 v1(77.94,21.76) ; X3_C1.2 10.07,17.77 10.57,18.26 11.35,18.26 X3_LDO.2 ; A1_SW.4 v1(77.94,32.55) ; v1(26.67,40.5) 26.41,40.77 BC_C5.2 ; v1(75.03,12.27) 74.82,12.48 AX_ESD.1 ; v1(80.44,6.3) 80.44,6.13 80.19,5.88 USB1.4 USB1.5 80.14,6.68 80.44,6.38 v1(80.44,6.3)
  TOP w0.381: X3_LDO.2 14.41,18.41 15.06,17.77 15.84,17.77 ; v1(11,40.54) 11.15,40.39 TTC_C1.2 14.14,40.39 14.19,40.34 ; XMEGA.18 16.37,15.72 15.88,16.21 X3_C2.2 ; v1(4.18,43.15) TS_R3.1 4.18,41.87 3.56,41.26 3.44,41.26 2.45,40.27 BC_C10.2 ; XL_LED4.2 XL_LED3.2 XL_LED2.2 XL_LED1.2 1.28,16.88 1.52,17.12 7.59,17.12 8,16.71 8,16.18 8.43,15.75 E_CVCC.2 9.06,16.52 9.53,16.99 X3_C1.2 ; Y_C1.2 53.51,24.25 53.82,24.56 57.35,24.56 58.93,22.99 58.93,21.84 v1(59.94,20.83)
  TOP w0.508: X3_C2.2 15.84,17.77 v1(14.4,16.33) ; XM_PDI.6 v1(34.67,15.11) ; AT_UCAP.2 v1(72.12,19.7) ; AC_C1.2 6.16,53.61 ADAPTER.1 ; BC_C8.1 v1(27.84,48.01)
  TOP w0.635: A3.1 81.38,20.45 80.86,20.97 A_R4.2 ; A0.1 81.38,52.87 81.02,53.23 A_R1.2 ; A2.1 81.38,31.25 81,31.64 A_R3.2 ; BB_P1.1 BB_P1.2 ; A1.1 81.38,42.06 80.88,42.56 A_R2.2
  BOTTOM w0.18: 19.56,1.13 BB_P1.1 ; BB_P1.1 19.56,2.88 ; BB_P1.1 18.69,2.01 ; VFB_R2.2 11.76,40.1 11.44,40.1 v1(11,40.54) ; 19.56,3.67 BB_P1.2 ; BB_P1.2 18.69,4.55 ; BB_P1.2 19.56,5.42 ; 46.42,15.08 UNK5V_C6.2 45.83,14.45 ; 33.79,13.59 XM_PDI.6 34.67,12.71
  BOTTOM w0.229: ACSET_R2.2 ISET2_R2.2 ISET1_R2.2 15.1,34.75 v1(14.05,35.8)
  BOTTOM w0.305: v1(29.49,13.13) 29.98,13.62 29.98,14.49 30.61,15.11 v1(34.67,15.11) ; UNK5V_C6.2 UNK5V_C5.2 UNK5V_C4.2 46.42,10.65 46.46,10.61 46.46,9.83 46.15,9.53 43.99,9.53 43.7,9.81 UNK5V_C7.2 43.7,11.16 v1(43.31,11.56) ; v1(41.33,11.43) 41.33,10.74 40.69,10.11 37.06,10.11 36.8,10.36 UNK5V_C1.2
  BOTTOM w0.508: v1(8.35,28.55) 7.67,27.87 7.67,21.69 13.03,16.33 v1(14.4,16.33) ; 34.75,21.21 35.03,21.21 35.06,21.23 36.3,21.23 36.8,20.73 UNK5V_C3.2 ; UNK5V_C1.2 UNK5V_C2.2 UNK5V_C3.2 ; UNK5V_C3.2 36.12,16.71 ; XM_PDI.6 v1(34.67,15.11)
  BOTTOM w0.762: 50.93,9.55 50.7,9.32 48.59,9.32
  vias: v1(5.31,28.55) v1(6.32,28.55) v1(7.34,28.55) v1(26.43,34.09) v1(26.43,33.07) v1(27.45,34.09) v1(27.45,33.07) v1(28.47,34.09) v1(28.47,33.07) v1(29.48,34.09) v1(29.48,33.07) v1(70.36,39.04) v1(71.2,39.04) v1(72.03,39.04) v1(72.87,39.04) v1(73.71,39.04) v1(74.55,39.04)
DC_IN+: length 18.7
  TOP w0.203: AC_R1.1 9.65,47.47 10.41,46.71 DC_Q1.1
  TOP w0.229: PG_R.1 STAT2_R.1 STAT1_R.1
  TOP w0.381: DC_Q1.1 DC_Q1.2 DC_Q1.3
  TOP w0.508: STAT1_R.1 1.36,43.8 ADAPTER.2
HP_B: length 7.2
  TOP w0.229: BC_C7.1 12.2,44.95 DC_Q1.5
  TOP w0.508: DC_Q2.5 16.98,45.72 16.24,46.45 BC_R2.1
HP_C: length 13.3
  TOP w0.229: AC_SENSE.1 23.11,45.47
  TOP w0.305: BATTERY_CHARGER.2 19.55,40.67 21.93,43.05 BC_C9.1 24.27,43.28 AC_SENSE.1
  TOP w0.508: AC_SENSE.1 24.27,46.89 24.71,47.33 24.75,47.33 25.39,47.97 BC_C8.2
HWB: length 1.2
  TOP w0.305: ATMEGA.13 65.17,10.98 65.2,10.95 v1(65.2,10.79)
I2C2_SCL: length 53.8
  TOP w0.305: XMEGA.15 19.72,19.84 19.25,20.3 XM_RSCL.2 ; v1(22.72,7.94) 20.75,5.97 v1(20.75,2.57)
  TOP w0.381: v1(15.62,12.95) 15.16,12.49 15.16,11.73 14.99,11.56 EEPROM.6 ; v1(21.08,13.46) 21.59,13.97 21.59,15.07 19.72,16.94 XMEGA.15
  BOTTOM w0.229: v1(15.62,12.95) 16.13,13.46 v1(21.08,13.46)
  BOTTOM w0.305: BB_P1.19 40.98,0.56 21.26,0.56 20.75,1.07 v1(20.75,2.57) ; v1(21.08,13.46) 22.72,11.82 v1(22.72,7.94)
I2C2_SDA: length 49.2
  TOP w0.381: EEPROM.5 13.64,9.71 13.95,9.4 15.49,9.4 v1(15.62,9.53) ; v1(19.56,12.57) 19.56,16.26 18.94,16.87 18.94,16.92 18.92,16.94 XMEGA.16 18.92,19.69 18.03,20.57 XM_RSDA.2
  BOTTOM w0.229: v1(19.56,12.57) 16.51,9.53 v1(15.62,9.53)
  BOTTOM w0.305: v1(19.56,12.57) 20.78,11.35 20.78,3.66 21.11,3.33 41.2,3.33 BB_P1.20
ISET1: length 6.7
  TOP w0.254: BATTERY_CHARGER.11 16.09,37.22 15.62,36.76 15.62,35.94 v1(16.45,35.12)
  BOTTOM w0.254: ISET1_R1.2 ISET1_R2.1 16.45,33.83 v1(16.45,35.12)
ISET2: length 7.8
  TOP w0.254: v1(18.16,32.13) 18.16,32.79 18.55,33.18 BATTERY_CHARGER.15
  BOTTOM w0.254: ISET2_R1.2 v1(18.16,32.13) ISET2_R2.1
LED1: length 5.9
  TOP w0.254: AT_R1.1 64.4,6.9 65.28,7.77 65.28,9.65 64.37,10.56 ATMEGA.12
LED2: length 3.8
  TOP w0.254: AT_R2.1 64.52,8.75 64.52,9.65 63.57,10.6 ATMEGA.11
MISO: length 1
  TOP w0.305: v1(69.44,12.67) 69.02,13.1 ATMEGA.17
MOSI: length 1.7
  TOP w0.305: ATMEGA.16 67.57,11.53 v1(68.43,10.67)
PDI: length 11.9
  TOP w0.381: XMEGA.8 v1(27.68,16.52)
  BOTTOM w0.381: XM_PDI.1 28.57,12.06 28.57,16.26 28.31,16.52 v1(27.68,16.52)
PDI_CLK: length 10.8
  TOP w0.305: XM_PDI.5 30.27,11.73 30.27,11.58 29.63,10.93 XM_RPDI.2
  TOP w0.381: XMEGA.7 27.34,15.72 28.71,14.35 31.37,14.35 XM_PDI.5
SCK: length 1.5
  TOP w0.305: ATMEGA.15 66.77,11.21 v1(67.23,10.74)
SRP: length 44.9
  TOP w0.18: BC_C2.1 35.05,32.26 35.18,32.13
  TOP w0.203: 48.65,35.05 48.63,35.03 BC_C3.1
  TOP w0.254: 48.65,35.05 BATT_SENSE.1
  TOP w0.305: 35.18,32.13 21.34,32.13 19.41,30.21 18.17,30.21 17.4,30.98 17.4,34.29 18.05,34.94 BATTERY_CHARGER.14
  TOP w0.356: 35.18,32.13 48.4,32.13 48.65,32.38 48.65,35.05
SS: length 1.4
  TOP w0.305: v1(66.24,10.72) 65.97,10.99 ATMEGA.14
SYS_5V: length 2.5
  TOP w0.635: BB_P1.8 BB_P1.7
SYS_GND: length 25.6
  TOP w0.254: UNK5V_REG1.7 60.16,40.66 60.02,40.51 v1(60.01,40.51)
  TOP w0.305: 63.39,40.66 UNK5V_REG1.11 62.39,40.66 UNK5V_REG1.7 ; 63.39,40.66 63.89,41.16 UNK5V_REG1.5 ; 63.39,40.66 UNK5V_REG1.4
  BOTTOM w0.254: UNK5V_C11.2 60.5,40.16 60.15,40.51 v1(60.01,40.51)
  BOTTOM w0.305: UNK5V_C8.2 UNK5V_C9.2 UNK5V_C10.2 ; UNK5V_C11.2 UNK5V_C12.2 UNK5V_C13.2 UNK5V_C14.2
  BOTTOM w0.381: UNK5V_C14.2 60.9,34.73 61.49,34.14 67.31,34.14 67.59,34.42 UNK5V_C10.2
SYSTEM+: length 153.6
  TOP w0.18: v1(78.99,43.97) v1(78.99,44.7) v1(78.99,45.42)
  TOP w0.229: v1(78.99,22.43) v1(78.99,23.11) v1(78.99,23.8) ; v1(79.04,12.95) 78.97,12.88 78.97,12.52 78.99,12.5 78.99,12.27 v1(79.04,12.22) 79.02,12.22 A3_SW.TH 78.99,11.53 v1(78.97,11.51) ; v1(78.99,33.43) v1(78.99,34.04)
  TOP w0.305: BATTERY_CHARGER.1 20.05,40.23 21.6,41.78 25.26,41.78 25.79,42.31 BC_C9.2 28.22,43.05 29.07,43.9 AC_SENSE.2 ; UNK5V_REG1.2 65.12,39.66 65.14,39.67 65.33,39.67 66.01,40.36 66.01,40.55 66.01,42.24 65.84,42.42 65.84,42.44 65.76,42.52 v1(65.76,43.21) ; UNK5V_REG.3 UNK5V_REG.2 ; v1(65.01,43.25) 65.01,42.56 65.45,42.11 65.45,40.49 65.13,40.16 UNK5V_REG1.3
  TOP w0.33: v1(76.05,15.06) v1(76.05,16.81) v1(76.05,20.57) v1(76.05,21.67) 76.05,22.3 v1(75.9,22.45) ; 76,35.67 75.19,35.67 74.96,35.43 74.96,34.09 75.9,33.15 v1(75.9,27.48) 75.9,26.78 76.5,26.17 76.5,24.59 76.83,24.26 77.55,24.26 A2_SW.1 ; 76,35.67 76.38,36.04 76.38,43.61 75.16,44.83 75.16,46.2 75.64,46.69 76.33,46.69 77.04,45.97 77.16,45.97 77.68,45.45 A0_SW.1 ; 76,35.67 76.14,35.67 76.48,35.33 77.13,35.33 77.68,34.79 A1_SW.1 ; v1(76.05,13.11) 76.25,13.31 76.81,13.31 77.18,12.94 A3_SW.1 ; UNK5V_REG.2 40.95,14.04 40.13,14.85 40.13,16.1 v1(37.97,18.26)
  TOP w0.508: BATDRV_Q.5 55.96,44.22 56.23,43.95 BC_R1.1 BC_C4.1 ; 60.99,43.18 58.49,40.68 58.49,27.23 58.23,26.97 46.91,26.97 45.95,26.01 45.95,21.51 45.44,21.01 39.4,21.01 37.97,19.58 v1(37.97,18.26)
  BOTTOM w0.229: 78.99,12.22 79.04,12.27 v1(79.04,12.95)
  BOTTOM w0.305: v1(37.97,18.26) 39.79,18.26 40.11,17.95 UNK5V_C3.1 UNK5V_C2.1 UNK5V_C1.1 ; 64.5,41.91 64.42,41.99 64.42,42.66 v1(65.01,43.25) ; 64.5,41.91 64.29,41.7 UNK5V_C8.1 UNK5V_C9.1 UNK5V_C10.1 ; 64.5,41.91 64.56,41.85 65.27,41.85 65.76,42.34 v1(65.76,43.21)
  BOTTOM w0.33: v1(76.05,13.11) v1(76.05,15.06) v1(76.05,16.81) ; v1(76.05,20.57) v1(76.05,21.67) 76.05,22.3 v1(75.9,22.45) v1(75.9,27.48)
  BOTTOM w0.508: v1(65.01,43.25) 65.07,43.25 65.1,43.22
  vias: v1(72.35,47.91) v1(73.37,47.91) v1(74.38,47.91) v1(75.4,47.91) v1(76.41,47.91) v1(77.15,50.7) v1(77.15,49.68) v1(77.15,48.67) v1(77.43,47.91) v1(78.17,50.7) v1(78.17,49.68) v1(78.17,48.67) v1(79.02,34.65)
THERM: length 3.4
  TOP w0.381: TS_R3.2 5.47,40.51 TS_R2.1 4.8,40.27 4.78,40.25 TS_R1.1
TS: length 20.8
  TOP w0.229: BATTERY_CHARGER.6 17.55,41.17 17.01,41.71 9.73,41.71 9.54,41.51 9,41.51 8.81,41.71 7.9,41.71 7.37,41.17 7.37,38.51 7.1,38.24 7.1,38.21 6.73,37.85 4.44,37.85 4.04,38.25 TS_R1.2
  TOP w0.381: TS_R1.2 3.3,38.95 3.27,38.98 BC_C10.1
USB5V: length 40.5
  TOP w0.254: AT_C3.1 62.77,22.21 ATMEGA.31 ; AT_C3.1 AT_C2.1 ; AT_C3.1 62.5,22.48 AT_C1.1
  TOP w0.305: v1(72.54,7.62) TVS1.5 ; ATMEGA.32 ATMEGA.31
  TOP w0.381: USB1.1 76.94,3.48 v1(76.76,3.3) ; ATMEGA.32 61.97,19.02 62.23,18.76 v1(62.23,18.03) 62.23,17.26 61.62,16.66 ATMEGA.4
  BOTTOM w0.381: v1(62.23,18.03) 63.5,19.3 65.35,19.3 72.54,12.12 v1(72.54,7.62) 73.81,6.35 75.95,6.35 76.76,5.54 v1(76.76,3.3)
VFB: length 8
  TOP w0.254: BATTERY_CHARGER.12 v1(16.82,36.12)
  BOTTOM w0.254: VFB_R2.1 VFB_R1.2 VFB_C1.2 15.62,37.21 15.88,36.96 15.88,36.41 16.16,36.12 v1(16.82,36.12)
VREF: length 61.8
  TOP w0.229: v1(9.27,38.35) 10.29,37.34 11.91,37.34 12.85,36.4 12.85,35.94 13.67,35.13 14.4,35.13 14.86,35.59 14.86,37.47 14.62,37.71 ; TS_R2.2 v1(6.59,38.98)
  TOP w0.305: v1(8.26,40.01) 8.99,40.01 v1(10.03,41.05) ; BATTERY_CHARGER.4 18.55,42.16 18.16,42.55 v1(17.91,42.55) ; VREF_C1.1 14.34,37.99 14.62,37.71 16.8,37.71 BATTERY_CHARGER.10
  BOTTOM w0.229: 8,37.97 7.59,37.97 v1(6.59,38.98)
  BOTTOM w0.254: ISET1_R1.1 20.58,33.78 21.48,32.88 ISET2_R1.1 21.48,31.38 21.6,31.25 ACSET_R1.1 21.6,29.48 21.42,29.3 14.39,29.3 13.84,29.84 13.84,34.54 13.84,34.54 13.84,34.67 13.59,34.92 13.08,35.43 10.89,35.43 10.71,35.25 10.71,35.18 10.46,34.92 7.99,34.92 6.86,36.06 6.86,36.83 8.38,38.35 v1(9.27,38.35)
  BOTTOM w0.305: v1(10.03,41.05) 10.48,41.49 10.63,41.49 10.79,41.66 17.02,41.66 v1(17.91,42.55) ; v1(8.26,40.01) 8.26,39.37 v1(9.27,38.35)
XAVR_RX: length 52.5
  TOP w0.305: v1(55.32,19.02) 49.91,19.02 47.7,21.23 46.79,21.23 v1(45.67,20.12) ; v1(21.77,22.58) 20.52,21.33 XMEGA.14
  BOTTOM w0.305: v1(45.67,20.12) 43.23,20.12 40.46,22.89 22.07,22.89 v1(21.77,22.58) ; v1(55.32,19.02) 57.34,17.01 UART_R2.2
XAVR_TX: length 55.1
  TOP w0.305: v1(45.85,19.05) 47.29,20.5 47.7,20.5 50.57,17.63 54.58,17.63 v1(55.09,18.14) ; v1(55.91,11.46) 55.91,10.39 v1(58.65,7.65) ; XMEGA.13 21.32,20.58 21.67,20.93 21.67,21.06 21.92,21.33 21.97,21.41 21.97,21.41 22.06,21.54 22.07,21.56 22.09,21.58 v1(22.68,22.17)
  BOTTOM w0.305: v1(55.09,18.14) 56.06,17.17 56.36,17.17 56.67,16.87 56.67,11.76 56.36,11.46 v1(55.91,11.46) ; v1(22.68,22.17) 40.16,22.17 43.28,19.05 v1(45.85,19.05) ; v1(58.65,7.65) 58.65,7.64 58.08,7.64 UART_R1.2
XL_LED1: length 14
  TOP w0.381: XMEGA.23 16.57,11.72 16.35,11.94 v1(16,11.94) ; XL_R1.1 v1(6.83,16.1)
  BOTTOM w0.381: v1(6.83,16.1) 7.35,15.59 7.35,15.26 10.67,11.94 v1(16,11.94)
XL_LED2: length 13.5
  TOP w0.381: XMEGA.24 16.12,10.92 v1(16,10.79) ; v1(6.73,14.35) 5.58,14.35 XL_R2.1
  BOTTOM w0.381: v1(6.73,14.35) 10.17,10.92 15.15,10.92 15.28,10.79 v1(16,10.79)
XL_LED3: length 15.6
  TOP w0.381: XL_R3.1 v1(6.86,12.7) ; XMEGA.25 18.3,9.47 17.97,9.14 16.76,9.14 v1(16,8.38)
  BOTTOM w0.381: v1(16,8.38) 11.18,8.38 v1(6.86,12.7)
XL_LED4: length 17.2
  TOP w0.381: v1(17.4,7.87) 18.13,7.87 18.38,8.13 19.3,8.13 19.72,8.54 XMEGA.26 ; v1(6.86,10.67) 5.85,10.67 XL_R4.1
  BOTTOM w0.381: v1(17.4,7.87) 16.52,7.87 16.23,7.58 14.69,7.58 14.34,7.24 10.29,7.24 v1(6.86,10.67)
XMEGA_3V3: length 58.9
  TOP w0.254: X_L1.1 27.94,8.88 X3_C3.1
  TOP w0.305: XM_RSCL.1 16.85,22.34 15.86,21.35 XM_RSDA.1 ; X3_C3.1 XM_RPDI.1
  TOP w0.381: X3_C2.1 16.69,19.06 17.47,18.29 XMEGA.17 18.41,16.52 18.8,16.14 v1(18.8,14.35) ; X3_C2.1 15.57,19.36 X3_LDO.5 ; X3_C2.1 15.88,20.56 XM_RSDA.1 ; X3_C3.1 v1(26.17,9.64) ; XM_PDI.2 33.02,6.86 27.9,6.86 27.32,7.44 X_L1.1 ; E_CVCC.1 12.58,15.75 13.64,14.68 EEPROM.8 14.61,14.1 v1(15.11,14.61)
  BOTTOM w0.381: v1(18.8,14.35) 19.31,14.86 ; 19.31,14.86 19.31,15.12 19.56,15.37 19.56,15.5 20.7,16.64 20.7,19.94 15.88,15.12 15.63,15.12 v1(15.11,14.61) ; 19.31,14.86 20.95,14.86 v1(26.17,9.64)
XSW1: length 12.5
  TOP w0.305: XMEGA.27 20.52,8.4 13.46,1.35 X_RSW1.2
XSW2: length 11.9
  TOP w0.305: v1(19.8,6.31) 21.32,7.83 XMEGA.28 ; v1(17.13,6.31) 16.23,5.41 X_RSW2.2
  BOTTOM w0.305: v1(17.13,6.31) v1(19.8,6.31)
XTAL1: length 11.2
  TOP w0.305: ATMEGA.1 56.55,19.06 54.44,21.16 Y1.1 55.09,21.56 55.63,22.1 55.63,23.24 55.24,23.62 Y_C1.1
XTAL2: length 11.7
  TOP w0.305: ATMEGA.2 56.22,18.26 55.91,17.95 55.91,16 56.65,15.26 Y1.3 56.99,14.86 55.33,13.21 Y_C2.1
N00755: length 2.1
  TOP w0.305: v1(45,11.57) 45,12.2 UNK5V_REG.6
  BOTTOM w0.305: UNK5V_C7.1 v1(45,11.57)
N01124: length 3.4
  TOP w0.33: UNK5V_L1.1 41.35,15.67 41.71,15.32 UNK5V_REG.1
N01136: length 3.4
  TOP w0.33: UNK5V_L1.2 44.4,15.67 44.65,15.41 UNK5V_REG.10
N06480: length 2.2
  TOP w0.305: BATTERY_CHARGER.7 16.82,39.7 16.13,40.39 TTC_C1.1
N10941: length 9.3
  TOP w0.203: BTST_D1.2 26.15,39.12 22.48,39.12 21.59,38.22 BATTERY_CHARGER.22
  TOP w0.305: BTST_D1.2 26.6,39.05 27.42,39.87 BC_C6.1
N11437: length 8.1
  TOP w0.203: BC_C1.1 24.38,35.45 24.26,35.57 24.64,35.57 24.76,35.69
  TOP w0.229: BTST_D1.1 25.84,37.15 25.35,36.66 25.35,36.28 24.76,35.69 20.79,35.69 20.48,36 BATTERY_CHARGER.18
N12143: length 11.6
  TOP w0.229: v1(22.99,37.21) 22.34,37.21 22.33,37.22 BATTERY_CHARGER.20
  TOP w0.305: v1(27.69,37.72) 28.71,38.75 BC_C6.2
  BOTTOM w0.229: v1(22.99,37.21) 23.64,37.21 24.15,37.72 v1(27.69,37.72)
N12276: length 11.5
  TOP w0.229: v1(26.42,36.2) 30.89,36.2 31.1,35.99 LOWDRV_Q.4 ; BATTERY_CHARGER.19 21.49,36.72 21.89,36.32 23.12,36.32 23.3,36.5 v1(23.95,36.5)
  BOTTOM w0.229: v1(23.95,36.5) 24.6,36.5 24.65,36.55 24.7,36.55 24.88,36.72 25.89,36.72 v1(26.42,36.2)
N13368: length 15.7
  TOP w0.229: v1(22.61,38.23) 22.1,37.72 21.97,37.72 21.97,37.72 BATTERY_CHARGER.21 ; v1(30.35,43.05) 30.35,43.81 30.48,43.94 30.48,44.37 30.73,44.63 HIDRV_Q.4
  BOTTOM w0.305: v1(30.35,43.05) 30.35,40.51 28.96,39.12 27.81,39.12 27.05,38.35 23.38,38.35 23.26,38.23 v1(22.61,38.23)
N13432: length 11.4
  TOP w0.305: v1(19.3,42.16) 18.17,43.29 BC_VCC_R1.2 ; BC_C5.1 23.63,40.77 23.38,41.02 21.97,41.02 v1(20.95,40.01) 20.95,39.41 BATTERY_CHARGER.24
  BOTTOM w0.305: v1(20.95,40.01) 20.95,40.51 v1(19.3,42.16)
N14571: length 5.2
  TOP w0.508: BC_R1.2 56.17,42.66 56.17,42.67 55.88,42.67 55.48,42.27 BATDRV_Q.4 ; BC_R1.2 BATDRV_R1.2 ; BC_R1.2 BC_C4.2
N17959: length 21.3
  TOP w0.229: DC_Q1.4 10.72,43.98 10.91,43.79 BC_C7.2 10.02,43.05 9.78,43.29 v1(9.78,43.94)
  TOP w0.508: v1(15.24,48.01) 15.24,48.9 15.75,49.4 17.13,49.4 17.54,49 BC_R2.2 19.6,48.26 20.65,47.21 ; 20.65,47.21 DC_Q2.4 ; 20.65,47.21 21.45,48.01 ACDRV_R1.1
  BOTTOM w0.229: v1(9.78,43.94) 13.72,47.88 14.46,47.88 14.59,48.01 v1(15.24,48.01)
N25363: length 4.3
  TOP w0.254: ATMEGA.27 65.97,21.54 66.27,21.84 AT_UCAP.1
N28611: length 18.3
  TOP w0.305: v1(67.31,13.46) 62.36,13.46 61.97,13.07 ATMEGA.9 ; 74.09,17.14 74.09,15.34 72.45,13.7 AX_R1.1 71.55,12.09 v1(71.25,11.79)
  BOTTOM w0.381: v1(67.31,13.46) 68.89,11.88 68.93,11.88 69.02,11.79 v1(71.25,11.79)
N28615: length 21.8
  TOP w0.305: v1(66.29,14.22) 61.98,14.22 61.21,13.46 ATMEGA.8 ; AX_R2.1 v1(70.79,10.49) 70.3,10.98 70.3,11.82 70.76,12.28 70.76,13.61 70.76,13.69 71.93,14.86 71.93,17.14
  BOTTOM w0.305: v1(70.79,10.49) 70.3,10.98 69.09,10.98 68.71,11.36 68.44,11.36 66.29,13.5 v1(66.29,14.22)
N52573: length 1.7
  TOP w0.381: XL_LED1.1 XL_R1.2
N52694: length 1.7
  TOP w0.381: XL_LED2.1 XL_R2.2
N78533: length 41.9
  TOP w0.305: v1(22.99,40.13) 22.5,39.65 22.37,39.65 21.45,38.72 BATTERY_CHARGER.23
  TOP w0.508: BATDRV_R1.1 56.27,39.87 v1(55.88,40.26)
  BOTTOM w0.381: v1(55.88,40.26) 54.74,40.26 49.66,45.34 27.05,45.34 26.67,44.96 26.67,43.94 23.47,40.75 23.47,40.62 v1(22.99,40.13)
N88999: length 1.7
  TOP w0.381: XL_R3.2 XL_LED3.1
N237956: length 2.5
  TOP w0.305: X_SW1.2 11.05,3.25 10.54,2.74 10.54,1.56 X_RSW1.1
N237958: length 2.2
  TOP w0.305: X_SW2.2 10.78,6.81 X_RSW2.1
N239177: length 1.7
  TOP w0.381: XL_LED4.1 XL_R4.2
N264783: length 10.3
  TOP w0.305: v1(61.39,42.24) 61.39,41.18 UNK5V_REG1.6
  BOTTOM w0.305: UNK5V_C14.1 63.14,35.74 63.36,35.95 63.36,41.8 62.92,42.24 v1(61.39,42.24)
N264867: length 3.3
  TOP w0.305: UNK5V_L2.1 64.24,38.05 64.37,38.18 UNK5V_REG1.1
N264879: length 3.3
  TOP w0.305: UNK5V_REG1.10 61.42,38.28 61.19,38.05 UNK5V_L2.2
N296592: length 16.5
  TOP w0.254: v1(64.01,18.03) 64.01,18.8 63.57,19.23 ATMEGA.30 ; USB_RD-.2 v1(67.06,6.83)
  BOTTOM w0.254: v1(67.06,6.83) 64.01,9.88 v1(64.01,18.03)
N308927: length 6
  TOP w0.305: TVS1.3 76.72,8.12 77.32,7.52 77.32,5.33 77.57,5.08 USB1.3
N308936: length 5.2
  TOP w0.305: USB1.2 77.5,4.28 76.71,5.07 76.71,6.13 75.72,7.12 TVS1.1
N309107: length 15.5
  TOP w0.254: v1(65.19,18.03) 65.19,18.88 64.37,19.7 ATMEGA.29 ; USB_RD+.2 v1(67.06,8.51)
  BOTTOM w0.254: v1(67.06,8.51) 66.59,8.98 65.72,8.98 64.54,10.16 64.54,10.52 64.54,10.52 64.54,11.07 64.54,11.07 64.54,16.72 65.19,17.37 v1(65.19,18.03)
N311917: length 4.3
  TOP w0.305: USB_RD-.1 72.85,6.83 73.14,7.12 TVS1.6
N311931: length 4.4
  TOP w0.305: USB_RD+.1 72.75,8.51 73.14,8.12 TVS1.4
N338027: length 20.1
  TOP w0.229: BATTERY_CHARGER.5 18.05,41.39 17.27,42.16 v1(9.27,42.16)
  TOP w0.381: v1(7.91,36.81) 7.26,36.81 7.2,36.75 STAT1.2
  BOTTOM w0.229: v1(9.27,42.16) 9.27,39.47 9.5,39.24 9.56,39.24 10.03,38.78 10.03,37.78 9.8,37.56 8.65,37.56 v1(7.91,36.81)
N338054: length 16
  TOP w0.203: STAT2.2 7.8,35.23 8.89,36.32 8.89,36.96 7.87,37.97 7.87,38.79 8.08,38.99 9,38.99 9.01,38.99 14.09,38.99 14.86,38.22 BATTERY_CHARGER.9
N338081: length 16.4
  TOP w0.203: BATTERY_CHARGER.8 15.12,38.72 14.42,39.43 11.25,39.43 10.87,39.8 v1(10.19,39.8)
  TOP w0.381: v1(9.78,36.45) 7.04,33.71 PG.2
  BOTTOM w0.203: v1(10.19,39.8) 10.64,39.35 10.64,39.27 10.79,39.12 10.79,37.47 v1(9.78,36.45)
N339049: length 10.5
  TOP w0.305: v1(22.73,43.81) 21.97,43.81 19.05,40.89 BATTERY_CHARGER.3
  TOP w0.508: v1(22.99,46.86) 23.11,46.86 23.76,47.51 ACDRV_R1.2
  BOTTOM w0.229: v1(22.99,46.86) 22.99,46.21 22.73,45.96 v1(22.73,43.81)
N361426: length 5.2
  TOP w0.305: A1_SW.5 84.01,33.29 84.19,33.46 A1_RBLEED.1
N369889: length 9.4
  BOTTOM w0.305: BB_P1.26 51.19,3.4 53.59,3.4 53.9,3.71 53.9,6.1 54.74,6.93 UART_R1.1
N369898: length 10.3
  BOTTOM w0.305: UART_R2.1 55.24,8.69 52.37,5.82 48.77,5.82 BB_P1.24
N1531774: length 5.3
  TOP w0.305: A0_RBLEED.1 84.19,44.26 83.88,43.95 A0_SW.5
N1533194: length 5.3
  TOP w0.305: A2_SW.5 83.91,22.36 84.19,22.64 A2_RBLEED.1
N1533894: length 5.3
  TOP w0.305: A3_SW.5 83.8,11.44 84.19,11.82 A3_RBLEED.1
N2875681: length 3
  TOP w0.508: A0_LED.2 A_R1.1
N2875801: length 3.3
  TOP w0.508: A_R2.1 A1_LED.2
N2875921: length 3.3
  TOP w0.508: A_R3.1 A2_LED.2
N2876041: length 3.3
  TOP w0.508: A_R4.1 A3_LED.2
N2971130: length 1.8
  TOP w0.254: AT_R2.2 AT_LED2.1
N2971680: length 1.8
  TOP w0.254: AT_R1.2 AT_LED1.1
N3380210: length 1.6
  TOP w0.381: STAT1_R.2 STAT1.1
N3380480: length 1.6
  TOP w0.381: STAT2_R.2 STAT2.1
N3380750: length 1.6
  TOP w0.381: PG.1 PG_R.2
N3477030: length 1.7
  TOP w0.381: AC_C1.1 9.65,51.93 AC_R1.2

## Copper pours and planes (outline as drawn; the poured copper is in the pictures)
5V_PSU on TOP: 44.15,14.25 44.15,13.26 51.34,13.26 51.34,14.25
A_CH0 on TOP: 77.22,43.43 77.22,47.27 78.99,47.27 78.99,51.66 77.22,51.66 77.22,54.1 86.15,54.1 86.15,43.43
A_CH1 on TOP: 77.22,43.24 77.22,32.77 86.16,32.77 86.16,43.24
A_CH2 on TOP: 77.22,32.58 77.22,21.84 86.15,21.84 86.15,32.58
A_CH3 on TOP: 77.22,21.62 77.22,10.89 86.15,10.89 86.15,21.62
BATTERY on TOP: 20.83,24.72 20.83,23.42 2.54,23.42 2.54,27.56 22.48,27.56 22.48,30.65 52.83,30.65 52.83,35.31 54.23,35.31 54.23,38.02 52.48,38.02 52.48,42.67 58.05,42.67 58.05,27.41 45.47,27.41 45.47,24.72
COMMON on TOP: 25.4,34.54 25.4,32.51 35.81,32.51 35.81,34.54
COMMON on TOP: 67.84,42.7 67.84,38.56 75.03,38.56 75.03,42.7
COMMON on TOP: 2.54,28.07 2.54,31.5 6.73,31.5 6.73,29.21 19.6,29.21 19.6,28.07
COMMON on BOTTOM: 35.26,22.59 35.26,0.58 0.36,0.58 0.36,22.59
COMMON on BOTTOM: 49.05,20.32 49.05,8.92 35.86,8.92 35.86,20.32
COMMON on BOTTOM: 50.83,0.3 50.83,23.93 40.11,23.93 40.11,23.92 0.65,23.92 0.65,54.18 40.11,54.18 40.11,31.29 58.52,31.29 58.52,25.25 76.4,25.25 76.4,38.02 69.6,38.02 69.6,46.43 65.43,46.43 65.43,54.31 85.87,54.31 85.87,0.3
DC_IN+ on TOP: 2.79,48.26 2.79,44.45 11.3,44.45 11.3,48.26
HP_B on TOP: 11.81,47.5 11.81,43.94 19.56,43.94 19.56,47.5
HP_C on TOP: 24.77,44.2 24.77,46.39 20.07,46.39 20.07,44.2
Net_74 on TOP: 0.3,0.31 0.3,22.1 36.09,22.1 36.09,10.67 49.15,10.67 49.15,12.83 51.64,12.83 51.64,14.71 49.15,14.71 49.15,25.27 75.44,25.27 75.44,10.67 86.15,10.67 86.15,0.31
SRP on TOP: 43.93,40.91 43.93,37.52 49.34,37.52 49.34,40.91
SYSTEM+ on TOP: 60.74,42.74 60.74,44.06 28.44,44.06 28.44,48.77 71.75,48.77 71.75,54.03 78.77,54.03 78.77,47.04 76.33,47.04 76.33,44.06 66.03,44.06 66.03,42.74
SYSTEM+ on BOTTOM: 78.44,11.15 78.44,47.42 71.63,47.42 71.63,51.49 81.1,51.49 81.1,47.42 79.63,47.42 79.63,11.15
N12143 on TOP: 28.22,35.19 28.22,42.53 34.31,42.53 34.31,40.61 39.17,40.61 39.17,36.6 34.31,36.6 34.31,35.19

## Text on the board
Ref Des/Silkscreen Bottom: QUINN MIKELSON | 2/13/2017 | OnyxPSU Rev 1.0
Ref Des/Silkscreen Top: HWB | SS | SCK | MISO | MOSI | +12V | +15V | BATTERY | DC IN
